# Altium PCB G031_Dev.PcbDoc
Units mil, origin at the board's own origin, x right, y up, seen from the top; angles counter-clockwise.
Board outline 2525 x 800 mil, 2 copper layers (Top Layer, Bottom Layer), stack 38.548 mil thick; 45 components, 55 nets, 211 pads, 106 vias.
Unrouted connection lines stored in the file: 3.
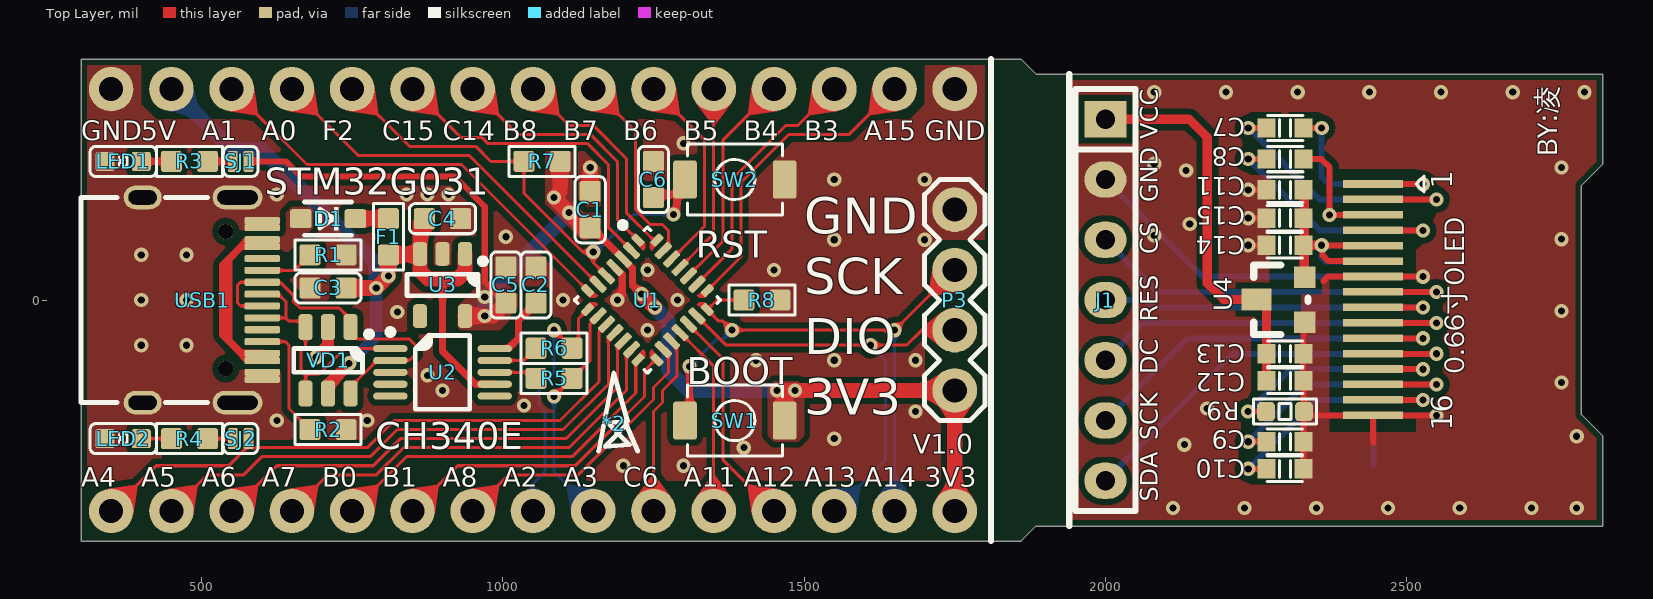
[diagram p0: Top Layer view]
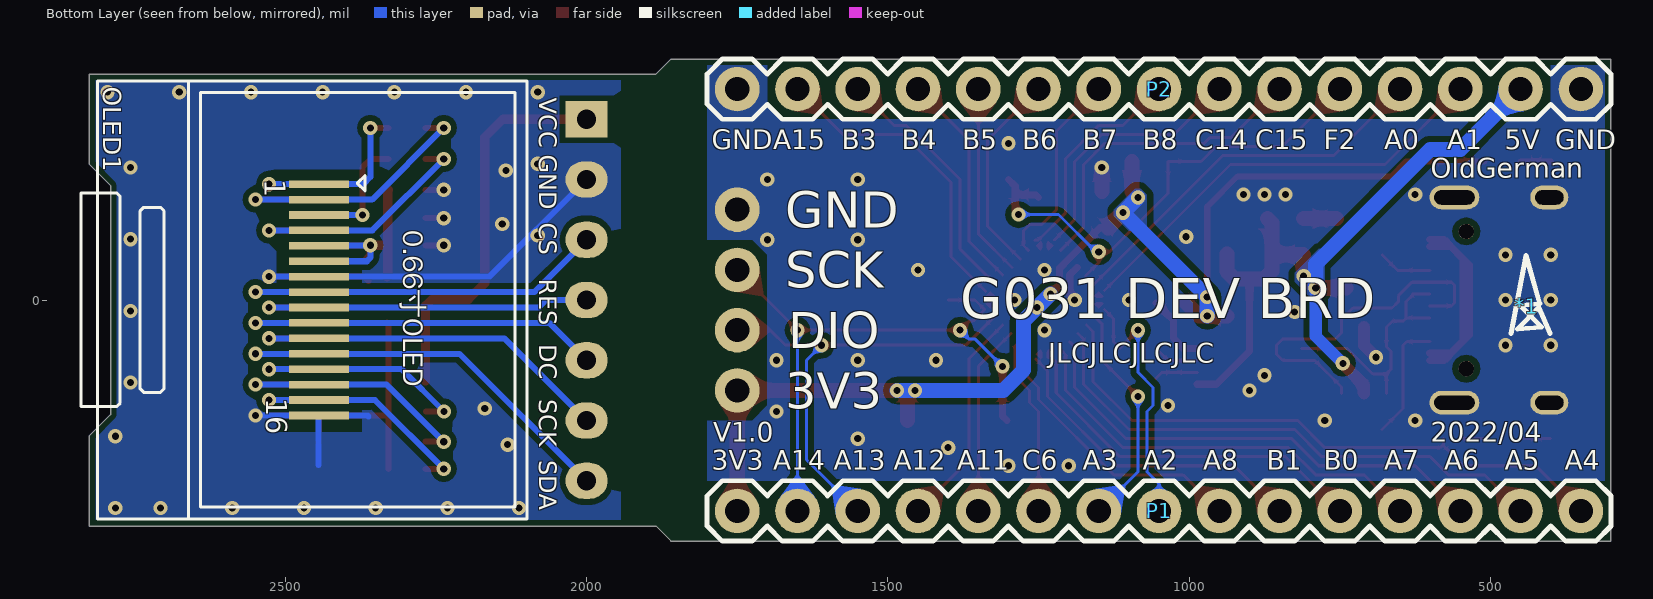
[diagram p1: Bottom Layer view, seen from below]

## Layer stack, top to bottom
Top Solder: solder mask 0.4, Solder Resist, Dk 3.5
Top Layer: signal copper 1.4
Dielectric 1: dielectric 35.748, FR-4, Dk 4.8
Bottom Layer: signal copper 1.4
Bottom Solder: solder mask 0.4, Solder Resist, Dk 3.5

## Board outline
300,-400 300,400 1860,400 1885,375 2825,375 2825,225 2790,190 2790,-190 2825,-225 2825,-375 1885,-375 1860,-400

## Design rules (kind name [scope] priority, off if disabled: settings)
BoardOutlineClearance [All] p1: gap=0 ignorepadtopadclearanceinfootprint=FALSE except(10: Poly-OutlineEdge Poly-CavityEdge Poly-CutoutEdge Poly-SplitBarrior)
Clearance [All] p1: gap=5 ignorepadtopadclearanceinfootprint=FALSE except(0: Arc-Hole Track-Hole SMDPad-Hole THPad-Hole Via-Hole Fill-Hole Poly-Hole Region-Hole Text-Hole; 10: Arc-Fill Arc-Poly Arc-Region Track-Fill Track-Poly Track-Region SMDPad-Fill SMDPad-Poly SMDPad-Region THPad-Fill THPad-Poly THPad-Region Via-Fill Via-Poly Via-Region Fill-Fill Fill-Poly Fill-Region Poly-Poly Poly-Region Region-Region)
HoleSize [All] p1: absolutevalues=TRUE maxlimit=196.85 minlimit=11.81 maxpercent=80.000 minpercent=20.000
MinimumSolderMaskSliver [All] p1: minsoldermaskwidth=0
PlaneClearance [All] p1: clearance=10
PlaneConnect [All] p1: planeconnectstyle=Direct reliefexpansion=20 reliefentries=4 reliefconductorwidth=10 reliefairgap=10
PolygonConnect [All] p1: connectstyle=Direct reliefconductorwidth=10 reliefentries=4 polygonreliefangle="90 Angle" airgapwidth=10
RoutingVias [All] p1: holewidth=11.81 width=23.62 viastyle="Through Hole" minholewidth=11.81 minwidth=23.62 maxholewidth=196.85 maxwidth=208.66
SilkToSilkClearance [All] p1: silktosilkclearance=0
SilkToSolderMaskClearance [IsPad] p1: minsilkscreentomaskgap=0 clearancetoexposedcopper=TRUE
SolderMaskExpansion [All] p1: expansion=2
Width [All] p1: maxlimit=50 minlimit=5 preferedwidth=5
24 further rules are at their usual default settings.

## Components (designator, comment, footprint, x,y, rotation, side; value= is the part's Value field where it differs from the comment)
*1 "ODG_LOGO" ODG_LOGO 440,-10 r180 bottom
*2 "ODG_LOGO" ODG_LOGO 1185,-205 r0 top
C1 "1uF/X7R" C0603 1145,150 r90 top value=0.1u
C2 "100nF" C0603 1055,25 r270 top value=0.1u
C3 "100nF" C0603 710,20 r0 top value=0.1u
C4 "1uF/X7R" C0603 900,135 r180 top value=0.1u
C5 "1uF/X7R" C0603 1005,25 r270 top value=0.1u
C6 "100nF" C0603 1250,200 r270 top value=0.1u
C7 "1uF" 0603-C 2297.98,285.59 r0 top
C8 "1uF" 0603-C 2297.98,233.9 r0 top
C9 "4.7uF" 0603-C 2297.98,-235.1 r180 top
C10 "2.2uF" 0603-C 2297.98,-280.1 r180 top
C11 "4.7uF" 0603-C 2297.98,182.9 r0 top
C12 "106" 0603-C 2297.98,-134.1 r0 top
C13 "104" 0603-C 2297.98,-89.1 r0 top
C14 "104" 0603-C 2297.98,90.9 r180 top
C15 "106" 0603-C 2297.98,135.9 r180 top
D1 "B5819W" SOD-323 710,135 r0 top
F1 "6V/0.5A" FUSE0603_0.5MM 810,105 r270 top
J1 "2.54*1*7" "Pin HDR1X7/2.54mm-S" 2000,300 r0 top
LED1 "LED" LED0603_GREEN 370,230 r180 top value=color?
LED2 "LED" LED0603_YELLOW 370,-230 r180 top value=color?
OLED1 "0.66寸OLED" 0.66OLED-W 2444,0.39 r270 bottom
P1 "CONN_X15" 2.54MM_MALE_X15 350,-350 r0 bottom locked
P2 "CONN_X15" 2.54MM_MALE_X15 350,350 r0 bottom locked
P3 "CONN_X4" 2.54mm_Male_x4 1750,-150 r90 top locked
R1 "5.1K" R0603 710,75 r180 top value=22R
R2 "5.1K" R0603 710,-215 r0 top value=22R
R3 "5.1K" R0603 480,230 r180 top value=22R
R4 "5.1K" R0603 480,-230 r180 top value=22R
R5 "470R" R0603 1085,-130 r0 top value=22R
R6 "470R" R0603 1085,-80 r0 top value=22R
R7 "10K" R0603 1065,230 r180 top value=22R
R8 "10K" R0603 1430,0 r0 top value=22R
R9 "390K" 0603-R 2298,-185 r0 top
SJ1 "SJ_2P" SJ_2P_MINI 565,230 r180 top
SJ2 "SJ_2P" SJ_2P_MINI 565,-230 r180 top
SW1 "Button-2P" SWITCH_3X4_SMD 1385,-200 r0 top
SW2 "Button-2P" SWITCH_3X4_SMD 1385,200 r180 top
U1 "STM32G031G8U6" UFQFPN28-4x4mm_ODG 1240,0 r315 top locked
U2 "CH340E" "TI MSOP-10 DGS" 900,-120 r0 top
U3 "ME6211C33M5G" "ANALOG TSOT-23-5 UJ-5" 900,25 r270 top
U4 "SC662K-3.3V" SOT-23 2296,-2 r90 top
USB1 "Type-C" Type-C-TOP 300,0 r180 top locked
VD1 "USBLC6-2" "MICROCHIP SOT-23-6 M6" 710,-100 r270 top

## Footprints (in the part's own frame and the unit in brackets; to place one, negate y for a bottom-side part, rotate by r counter-clockwise, add the part's x,y. Pads: shape width x height; smd on the part's side, far side on the other; paste and mask are expansions set on the pad)
0.66OLED-W [mm]
  rect 0.32x2.54 smd: 1(-4.875,0) 2(-4.225,0) 3(-3.575,0) 4(-2.925,0) 5(-2.275,0) 6(-1.625,0) 7(-0.975,0) 8(-0.325,0) 9(0.325,0) 10(0.975,0) 11(1.625,0) 12(2.275,0) 13(2.925,0) 14(3.575,0) 15(4.225,0) 16(4.875,0)
  silkscreen extent -9.23,-10.03 9.23,8.76, body extent -9.23,-10.03 9.23,8.76, height 1.41
2.54mm_Male_x4 [mil]
  round 74 hole 40: 1(0,0) 2(100,0) 3(200,0) 4(300,0)
  silkscreen extent -50,-50 350,50
2.54MM_MALE_X15 [mil]
  round 74 hole 40: 1(0,0) 2(100,0) 3(200,0) 4(300,0) 5(400,0) 6(500,0) 7(600,0) 8(700,0) 9(800,0) 10(900,0) 11(1000,0) 12(1100,0) 13(1200,0) 14(1300,0) 15(1400,0)
  silkscreen extent -50,-50 1450,50
0603-C [mil] "Murata & TDK 0603,25V,±10%,X7R,SERAMIC"
  rect 30x32 smd mask+2: 1(-31,0) 2(31,0)
  silkscreen extent -29,-21 30,21, body extent -46,-16 46,16, height 31
0603-R [mil]
  rrect50% 30x32 smd mask+2: 1(-31.5,0) 2(31.5,0)
  silkscreen extent -52,-21 52,21, body extent -31,-16 32,16, height 18
"ANALOG TSOT-23-5 UJ-5" [mm] "SOT23, 5-Leads, Body 2.90x1.60mm, Pitch 0.95mm, IPC Medium Density"
  rrect50% 1x0.6 smd: 1(-1.31,0.95) 2(-1.31,0) 3(-1.31,-0.95) 4(1.31,-0.95) 5(1.31,0.95)
  silkscreen extent -1.12,-1.5 0.45,1.83, body extent -1.4,-1.45 1.4,1.45, height 1
C0603 [mil]
  rrect20% 35x35 smd: 1(-30,0) 2(30,0)
  silkscreen extent -55,-25 55,25, body extent -31,-16 32,16, height 32
FUSE0603_0.5MM [mil]
  rrect25% 35x35 smd: 1(-30,0) 2(30,0)
  silkscreen extent -55,-25 55,25, body extent -30,-17 30,17, height 23
LED0603_GREEN [mm] "Chip Diode, 2-Leads, Body 1.60x0.80mm, IPC Medium Density"
  rrect20% 0.8x0.8 smd: 1(-0.762,0) 2(0.762,0)
  silkscreen extent -1.4,-0.64 1.4,0.64, body extent -0.8,-0.4 0.8,0.4, height 0.53
LED0603_YELLOW [mm] "Chip Diode, 2-Leads, Body 1.60x0.80mm, IPC Medium Density"
  rrect20% 0.8x0.8 smd: 1(-0.762,0) 2(0.762,0)
  silkscreen extent -1.4,-0.64 1.4,0.64, body extent -0.8,-0.4 0.8,0.4, height 0.53
"MICROCHIP SOT-23-6 M6" [mm] "SOT23, 6-Leads, Body 2.90x2.80mm, Pitch 0.95mm, IPC Medium Density"
  rrect50% 1.1x0.6 smd: 1(-1.4,0.95) 2(-1.4,0) 3(-1.4,-0.95) 4(1.4,-0.95) 5(1.4,0) 6(1.4,0.95)
  silkscreen extent -1.22,-1.45 0.5,1.85, body extent -1.46,-1.45 1.46,1.45, height 1.45
ODG_LOGO [mil]
  silkscreen extent -26,-46 39,84
"Pin HDR1X7/2.54mm-S" [mil]
  rect 70x60 hole 32: 1(0,0)
  oval 70x60 hole 32: 2(0,-100) 3(0,-200) 4(0,-300) 5(0,-400) 6(0,-500) 7(0,-600)
  silkscreen extent -50,-650 50,50, body extent -50,-650 50,50, height 336
R0603 [mil]
  rrect25% 35x35 smd: 1(-30,0) 2(30,0)
  silkscreen extent -55,-25 55,25, body extent -31,-16 31,16, height 18
SJ_2P_MINI [mil]
  rrect30% 16x35 smd: 1(-13,0) 2(13,0)
  silkscreen extent -29,-25 29,25
SOD-323 [mm]
  rrect25% 0.9x0.8 smd: 1(-1.15,0) 2(1.15,0)
  silkscreen extent -1,-0.7 1,0.7, body extent -1.36,-0.62 1.36,0.63, height 1.05
SOT-23 [mil]
  rect 36x36 smd: 1(-35,-35) 2(40,-35)
  rect 36x50 smd: 3(3,45)
  silkscreen extent -55,-40 60,50, body extent -54,-48 60,62, height 47
SWITCH_3X4_SMD [mm]
  rrect20% 1x1.6 smd: 1(-2.1,0) 2(2.1,0)
  silkscreen extent -2,-1.5 2,1.5, body extent -2.5,-1.46 2.5,1.44, height 2.5
"TI MSOP-10 DGS" [mm] "MSOP, 10-Leads, Body 3.00x3.00mm, Pitch 0.50mm, IPC Medium Density"
  oval 1.45x0.3 smd: 1(-2.2,1) 2(-2.2,0.5) 3(-2.2,0) 4(-2.2,-0.5) 5(-2.2,-1) 6(2.2,-1) 7(2.2,-0.5) 8(2.2,0) 9(2.2,0.5) 10(2.2,1)
  silkscreen extent -2.32,-1.55 1.15,1.82, body extent -2.45,-1.55 2.45,1.55, height 1.1
Type-C-TOP [mm]
  round 0.65 hole 0.65: 0(-6.1,-2.89) 0(-6.1,2.89)
  oval 1.6x1 hole 0.6 slot 1.2 at 0 deg: 1(-2.6,4.325) 2(-2.6,-4.325)
  oval 2.1x1 hole 0.6 slot 1.7 at 0 deg: 3(-6.6,-4.325) 4(-6.6,4.325)
  rrect50% 1.5x0.3 smd: A1(-7.64,-3.35) A4(-7.64,-2.55) A5(-7.64,-1.25) A6(-7.64,-0.25) A7(-7.64,0.25) A8(-7.64,1.25) A9(-7.64,2.55) A12(-7.64,3.35) B1(-7.64,3.05) B4(-7.64,2.25) B5(-7.64,1.75) B6(-7.64,0.75) B7(-7.64,-0.75) B8(-7.64,-1.75) B9(-7.64,-2.25) B12(-7.64,-3.05)
  silkscreen extent -5.34,-4.33 0,4.33, body extent -7.69,-4.48 0.06,4.48, height 3.26
UFQFPN28-4x4mm_ODG [mil]
  rrect50% 22x12 smd: 1(-81.5,59.06) 7(-81.5,-59.06) 15(81.5,-59.06) 21(81.5,59.06)
  rrect50% 32x12 smd: 2(-76.5,39.37) 3(-76.5,19.69) 4(-76.5,0) 5(-76.5,-19.69) 6(-76.5,-39.37) 16(76.5,-39.37) 17(76.5,-19.69) 18(76.5,0) 19(76.5,19.69) 20(76.5,39.37)
  rrect50% 12x22 smd: 8(-59.06,-81.5) 14(59.06,-81.5) 22(59.06,81.5) 28(-59.06,81.5)
  rrect50% 12x32 smd: 9(-39.37,-76.5) 10(-19.69,-76.5) 11(0,-76.5) 12(19.69,-76.5) 13(39.37,-76.5) 23(39.37,76.5) 24(19.69,76.5) 25(0,76.5) 26(-19.69,76.5) 27(-39.37,76.5)
  Top Layer region: -58,63 -65,70 -65,74 -53,74 -53,63
  Top Layer region: -63,-58 -70,-65 -74,-65 -74,-53 -63,-53
  Top Layer region: 58,-63 65,-70 65,-74 53,-74 53,-63
  Top Layer region: 63,58 70,65 74,65 74,53 63,53
  Top Layer region: -63,58 -70,65 -74,65 -74,53 -63,53
  Top Layer region: -58,-63 -65,-70 -65,-74 -53,-74 -53,-63
  Top Layer region: 63,-58 70,-65 74,-65 74,-53 63,-53
  Top Layer region: 58,63 65,70 65,74 53,74 53,63
  silkscreen extent -122,-86 86,86, body extent -81,-81 81,81, height 24

## Part data
C1 C2 C3 C4 C5 C6: library part CAP, "Capacitor"
C7 C8 C9 C10 C11 C12 C13 C14 C15: library part CAP, "无极性电容"
D1: library part DIODE, "二极管"
F1: library part FUSE, "贴片自恢复保险丝"
J1: library part "Pin HDR1X7"
R1 R2 R3 R4 R5 R6 R7 R8: library part RES, "Resistor"
R9: library part RES
SJ1 SJ2: "焊接跳线"
SW1 SW2: "Button"
U1: "No Description Available", Mfr_Name=STMicroelectronics, Copyright="Copyright (C) 2022 Ultra Librarian. All rights reserved.", Manufacturer_Part_Number=STM32G031G8U6, RefDes=RefDes, Type=DEV
U3: "线性稳压芯片", BOM名称=¿Éµ÷É, 学习资源=www.ooocke.
U4: library part AMS1117, "三端稳压芯片"
USB1: library part USB-Type-C_16P
VD1: "Very low capacitance ESD protection / Features / ? 2 data-line protection / ? Protects VBUS / ? Very low capacitance: 3.5 pF max. / ? Very low leakage current: 150 nA max. / ? SOT-666 and SOT23-6L packages / ? RoHS compliant", BOM名称=Ç¯Î, 学习资源=www.ooocke., 属性=30V/0.2

## Free pads (board coordinates)
  rect 100x12.6 smd: 1(2444.23,192.61) 2(2444.23,167.02) 3(2444.23,141.43) 4(2444.23,115.84) 5(2444.23,90.25) 6(2444.23,64.66) 7(2444.23,39.07) 8(2444.23,13.48) 9(2444.23,-12.11) 10(2444.23,-37.71) 11(2444.23,-63.3) 12(2444.23,-88.89) 13(2444.23,-114.48) 14(2444.23,-140.07) 15(2444.23,-165.66) 16(2444.23,-191.25)

## Via types
v1: diameter 23.62, hole 11.81, Top Layer to Bottom Layer, tented both sides, 106 vias

## Nets (pads, with @x,y where several pads share a name; then routed paths per layer and width w, separated by ;. In a path a pad name is that pad's centre, name@x,y a point inside that pad or via, vN(x,y) a via of type N, cw(c..) or ccw(c..) an arc to the next point about the centre after c; other vN are vias at no path point)
3V3: C11.2 C14.1 C15.1 OLED1.5 OLED1.6 U4.2 | length 559.7
  Top Layer w10: C14.1 C14.1@2329.99,90.9 ; v1(2358.86,90.9) 2360.39,89.37 2360.39,74.22 2369.96,64.66 2444.23,64.66 ; v1@2359.19,90.58 2443.9,90.58 2444.23,90.25
  Top Layer w15: C11.2 2329.99,181.89 C14.1@2329.99,90.9 ; U4.2 2329.99,39.01 C14.1@2329.99,90.9 ; v1(2358.86,90.9) C14.1@2329.99,90.9
  Bottom Layer w10: OLED1.6 2364.72,64.36 2358.86,70.22 v1(2358.86,90.9) 2359.34,90.43 2443.52,90.43 OLED1.5
+3V3: C1.1 C5.2 P1.15 P3.1 R7.1 SJ1.1 SW1.2 U1.3 U3.5 | length 2176.5
  Top Layer w10: SJ1.1 640,230 665,205 920,205 970,155 970,30 C5.2
  Top Layer w12: C1.1@1135,120 C1.1 1147.84,120 U1.3 1215,52.84 1215,25 v1(1230,10)
  Top Layer w25: U3.5 v1(970,-26.57) 983.43,-26.57 C5.2 ; R7.1 1095,180 v1(1085,170) C1.1@1135,120 ; v1(1230,10) v1(1252.5,-12.5) ; v1(1455,-150) 1467.68,-150 ; SW1.2 1467.68,-150 ; P1.15 P3.1 v1(1485,-150) 1467.68,-150
  Bottom Layer w25: v1(970,-26.57) v1(970,5) v1(1110,145) v1(1085,170) ; v1(1230,10) v1(1252.5,-12.5) 1275,-35 1275,-116.45 1308.55,-150 v1(1455,-150) v1(1485,-150)
+5: D1.1 USB1.A4 USB1.A9 USB1.B4 USB1.B9 | length 546.3
  Top Layer w12: USB1.B4@600.69,-88.49 566.32,-88.49 545,-67.17 545,67.35 566.32,88.68 USB1.B9@600.69,88.68 ; USB1.A9 577.35,-100.39 535,-58.04 535,58.04 577.35,100.39 USB1.A4
CH340E_RX: R6.1 U2.9 | length 76.8
  Top Layer w5: U2.9 1034.69,-100.31 R6.1
CH340E_TX: R5.1 U2.8 | length 72.5
  Top Layer w5: U2.8 1045,-120 R5.1
CS#: J1.3 OLED1.8 | length 690.5
  Top Layer w10: 2444.23,13.48 2444.52,13.18 v1(2549.32,13.18)
  Bottom Layer w10: J1.3 2086.82,13.18 OLED1.8 v1(2549.32,13.18)
D+: U2.1 USB1.A6 USB1.B6 VD1.3 VD1.4 | length 424.5
  Top Layer w5: USB1.B6 640,-29.53 ; USB1.A6 627.72,9.84 640,-2.44 640,-29.53 ; VD1.4 672.6,-122.6 ; U2.1 737.24,-80.63 695.28,-122.6 672.6,-122.6 ; 640,-29.53 640,-30 645,-35 662.72,-35 VD1.3 672.6,-77.4 665,-85 665,-115 672.6,-122.6
D-: U2.2 USB1.A7 USB1.B7 VD1.1 VD1.6 | length 587.6
  Top Layer w5: USB1.A7 564.84,-9.84 560,-5 560,25 564.53,29.53 USB1.B7 630.47,29.53 653,7 653,-3 663.39,-13.39 728.39,-13.39 747.4,-32.4 VD1.1 747.4,-54.51 757.9,-65 845,-65 855,-75 855,-90 844.69,-100.31 U2.2 791.47,-100.31 747.4,-144.39 VD1.6
D/C#: J1.5 OLED1.10 | length 680.2
  Top Layer w10: 2444.23,-37.71 2444.52,-38 v1(2549.32,-38)
  Bottom Layer w10: J1.5 2062,-38 OLED1.10 v1(2549.32,-38)
GND: C1.2 C2.1 C3.1 C4.1 C5.1 C6.1 C9.1 C10.1 C11.1 C12.2 C13.2 C14.2 C15.2 J1.2 LED1.2 LED2.2 OLED1.7 OLED1.16 P2.1 P2.15 P3.4 R1.1 R2.2 R8.2 R9.2 SW2.1 U1.4 U2.3 U3.2 U4.1 USB1.1 USB1.2 USB1.3 USB1.4 USB1.A1 USB1.A12 USB1.B1 USB1.B12 VD1.2 | length 1747
  Top Layer w10: v1(2237.1,90.9) C14.2 ; v1(2237.1,135.9) C15.2 ; v1(2237.1,182.9) C11.1 ; C10.1 C9.1 C12.2 C13.2 2328.98,-39.02 U4.1 ; R9.2 2335.74,-191.25 2483.22,-191.25 2483.51,-191.54 v1(2549.32,-191.54) ; 2362,32 2369.07,39.07 2444.23,39.07 2444.37,38.92 2526.93,38.92 v1(2527.08,38.77)
  Top Layer w12: U1.4 1198,42 1198,8 v1(1190,0)
  Top Layer w20: v1(690,-95) 710,-75 VD1.2
  Top Layer w25: C1.2 v1(1145,220)
  Bottom Layer w10: J1.2 2161.23,38.77 OLED1.7 v1(2527.08,38.77) ; 2362.2,-192.91 2363.57,-191.54 OLED1.16 v1(2549.32,-191.54) ; 2444.88,-273.34 OLED1.16@2444.88,-192.91
  other v1: 2112,-345 2231,-345 2350,-345 2469,-345 2588,-345 2707,-345 2782,-345 1200,-275 1300,-275 1400,-245 2131,-240 1550,-230 2782,-226 625,-200 775,-200 1685,-185 2169,-180 1035,-175 900,-150 2757,-137 875,-125 1420,-100 1550,-100 1685,-100 400,-75 475,-75 1240,-50 825,-20 2757,-18 400,0 475,0 1100,0 1290,0 1240,50 1450,50 400,75 475,75 1550,100 1700,100 2757,101 1005,105 2081,107 2140,126 625,175 840,175 875,175 910,175 1550,200 1700,200 2134,215 2757,220 2081,226 1300,260 2081,345 2200,345 2319,345 2438,345 2557,345 2676,345 2795,345
NetC2_2: C2.2 U2.10 | length 117.1
  Top Layer w12: U2.10 1009.06,-80.63 1026.13,-63.56 1026.13,-33.87 C2.2
NetC7_1: C7.1 OLED1.2 | length 496.6
  Top Layer w10: v1(2237.1,285.59) C7.1 ; 2444.23,167.02 2444.51,166.73 v1(2549.33,166.73)
  Bottom Layer w10: v1(2237.1,285.59) 2355.96,166.72 OLED1.2 v1(2549.33,166.73)
NetC7_2: C7.2 OLED1.1 | length 367.4
  Top Layer w10: C7.2 v1(2358.86,285.59) ; 2444.23,192.61 2444.37,192.46 2526.93,192.46 v1(2527.08,192.32)
  Bottom Layer w10: v1(2358.86,285.59) 2358.86,204.14 2370.68,192.32 OLED1.1 v1(2527.08,192.32)
NetC8_1: C8.1 OLED1.4 | length 451.9
  Top Layer w10: v1(2237.1,233.9) C8.1 ; 2444.23,115.84 2444.37,115.69 2526.93,115.69 v1(2527.08,115.54)
  Bottom Layer w10: v1(2237.1,233.9) 2355.46,115.54 OLED1.4 v1(2527.08,115.54)
NetC8_2: C8.2 OLED1.3 | length 272.3
  Top Layer w10: C8.2 2358.25,233.9 2372,220.15 v1(2372,141) 2372.21,141.21 2444.01,141.21 2444.23,141.43
  Bottom Layer w10: v1(2372,141) 2372.07,141.07 2443.93,141.07 OLED1.3
NetC9_2: C9.2 OLED1.14 | length 486.6
  Top Layer w10: v1(2237.1,-235.1) C9.2 ; 2444.23,-140.07 2444.52,-140.36 v1(2549.32,-140.36)
  Bottom Layer w10: v1(2237.1,-235.1) 2331.83,-140.36 OLED1.14 v1(2549.32,-140.36)
NetC10_2: C10.2 OLED1.15 | length 450.1
  Top Layer w10: v1(2237.1,-280.1) C10.2 ; 2444.23,-165.66 2444.37,-165.81 2526.93,-165.81 v1(2527.08,-165.95)
  Bottom Layer w10: v1(2237.1,-280.1) 2351.24,-165.95 OLED1.15 v1(2527.08,-165.95)
NetD1_2: D1.2 F1.1 | length 54.7
  Top Layer w25: D1.2 F1.1
NetLED1_1: LED1.1 R3.2 | length 50
  Top Layer w10: LED1.1 R3.2
NetLED2_1: LED2.1 R4.2 | length 50
  Top Layer w5: LED2.1 R4.2
NetOLED1_13: OLED1.13 R9.1 | length 432.4
  Top Layer w10: v1(2236.62,-185) R9.1 ; 2444.23,-114.48 2444.37,-114.62 2526.93,-114.62 v1(2527.08,-114.77)
  Bottom Layer w10: v1(2236.62,-185) 2306.85,-114.77 OLED1.13 v1(2527.08,-114.77)
NetR1_2: R1.2 USB1.A5 | length 89.9
  Top Layer w5: USB1.A5 654.21,49.21 R1.2
NetR2_1: R2.1 USB1.B5 | length 201.2
  Top Layer w5: USB1.B5 638.9,-68.9 645,-75 645,-180 R2.1
NetR3_1: R3.1 SJ1.2 | length 42
  Top Layer w10: R3.1 SJ1.2
NetR4_1: R4.1 SJ2.2 | length 42
  Top Layer w5: R4.1 SJ2.2
PA0: P2.4 U1.6 | length 642.2
  Top Layer w5: P2.4 760,240 944.32,240 U1.6
PA1: P2.3 U1.7 | length 729
  Top Layer w5: P2.3 675,225 931.48,225 U1.7
PA2/TX: P1.8 R6.2 U1.8 | length 439.9
  Top Layer w5: v1(1085,-50) R6.2 1125.62,-69.38 1125.62,-30.86 U1.8
  Bottom Layer w5: P1.8 1050,-305 1070,-285 1070,-185 1060,-175 1060,-145 1085,-120 v1(1085,-50)
PA3/RX: P1.9 R5.2 U1.9 | length 378.9
  Top Layer w5: v1(1085,-160) R5.2 1145,-100 1145,-39.32 U1.9@1156.65,-27.67
  Bottom Layer w5: v1(1085,-160) 1085,-285 P1.9
PA4: P1.1 SJ2.1 U1.10 | length 1012.4
  Top Layer w5: P1.1 425,-275 545,-275 578,-242 SJ2.1@578,-239.5 ; SJ2.1 SJ2.1@578,-239.5 ; U1.10@1170.57,-41.59 1160,-52.16 1160,-135 1095,-200 820,-200 775,-245 583.5,-245 SJ2.1@578,-239.5
PA5: P1.2 U1.11 | length 900.4
  Top Layer w5: P1.2 510,-290 570,-290 600,-260 780,-260 825,-215 1100,-215 1175,-140 1175,-65 U1.11@1184.49,-55.51
PA6: P1.3 U1.12 | length 804
  Top Layer w5: P1.3 625,-275 785,-275 830,-230 1105,-230 1190,-145 1190,-77.84 U1.12@1198.41,-69.43
PA7: P1.4 U1.13 | length 707.5
  Top Layer w5: P1.4 710,-290 790,-290 835,-245 1110,-245 1205.2,-149.8 1205.2,-90.47 U1.13@1212.33,-83.35
PA8: P1.7 U1.16 | length 471.5
  Top Layer w5: P1.7 1010,-290 1125,-290 1250,-165 1250,-145 1274.8,-120.2 1274.8,-90.47 U1.16@1267.67,-83.35
PA11: P1.11 U1.18 | length 317.1
  Top Layer w5: U1.18@1295.51,-55.51 1350,-110 P1.11
PA12: P1.12 U1.19 | length 366.6
  Top Layer w5: U1.19@1309.43,-41.59 1365,-97.16 1365,-265 P1.12
PA13/SWDIO: P1.13 P3.2 U1.20 | length 777.2
  Top Layer w5: U1.20@1323.35,-27.67 1370.68,-75 v1(1610,-75) 1670,-75 1695,-50 P3.2
  Bottom Layer w5: P1.13 1635,-265 1635,-100 v1(1610,-75)
PA14/SWCLK/B\O\O\T\0\: P1.14 P3.3 R8.1 SW1.1 U1.21 | length 1021.5
  Top Layer w5: R8.1 1355.26,0 U1.21 1358.52,-35 1365.14,-35 v1(1380.14,-50) v1(1650,-50) P3.3
  Top Layer w12: SW1.1 1310,-192.32 v1(1310,-110)
  Bottom Layer w5: v1(1310,-110) 1355.06,-64.94 1365.2,-64.94 v1(1380.14,-50) ; P1.14 v1(1650,-50)
PA15: P2.14 U1.22 | length 523.4
  Top Layer w5: U1.22@1337.97,14.46 U1.22 1395,71.48 1395,195 1475,275 1575,275 P2.14
PB0: P1.5 U1.14 | length 608.1
  Top Layer w5: P1.5 840,-260 1115,-260 1220.59,-154.41 1220.59,-102.92 U1.14
PB1: P1.6 U1.15 | length 533.8
  Top Layer w5: P1.6 925,-275 1120,-275 1235,-160 1235,-117.43 U1.15@1254.46,-97.97
PB3: P2.13 U1.23 | length 427.9
  Top Layer w5: U1.23@1323.35,27.67 1380,84.32 1380,200 1470,290 1490,290 P2.13
PB4: P2.12 U1.24 | length 366.6
  Top Layer w5: U1.24@1309.43,41.59 1365,97.16 1365,265 P2.12
PB5: P2.11 U1.25 | length 319.1
  Top Layer w5: U1.25 1350,110 P2.11
PB6: P2.10 U1.26 | length 339.9
  Top Layer w5: P2.10 1335,265 1335,122.84 U1.26
PB7: P2.9 U1.27 | length 335.2
  Top Layer w5: P2.9 1220,280 1220,150 1245,125 1265,125 1275,115 1275,90.68 U1.27
PB8: P2.8 U1.28 | length 363.2
  Top Layer w5: P2.8 1110,290 1150,290 1205,235 1205,145 1250.23,99.77 1256.25,99.77 U1.28
PC6: P1.10 U1.17 | length 299.6
  Top Layer w5: P1.10 1250,-185 1265,-170 1265,-150 1288.72,-126.28 1288.72,-76.55 U1.17@1281.59,-69.43
PC14: P2.7 U1.1 | length 434.5
  Top Layer w5: P2.7 1025,275 1145,275 1190,230 1190,133.52 U1.1
PC15: P2.6 U1.2 | length 535.9
  Top Layer w5: P2.6 930,270 965,270 975,260 1140,260 1175,225 1175,120.68 U1.2
PF2/N\R\S\T\: C6.2 P2.5 R7.2 SW2.2 U1.5 | length 856.4
  Top Layer w5: P2.5 845,255 955,255 980,230 R7.2 1035,177.16 1132.16,80 v1(1150,80) 1150,62.16 U1.5
  Top Layer w12: C6.2 1254.5,174.5 1288.64,174.5 SW2.2@1288.8,174.66 ; v1(1283.22,141.78) 1283.22,144.93 1288.8,150.5 SW2.2@1288.8,174.66 ; SW2.2@1300,200 1288.8,188.8 SW2.2@1288.8,174.66
  Bottom Layer w5: v1(1150,80) 1155,80 1216.78,141.78 v1(1283.22,141.78)
RES#: J1.4 OLED1.9 | length 615.2
  Top Layer w10: 2444.23,-12.11 2444.37,-12.26 2526.93,-12.26 v1(2527.08,-12.41)
  Bottom Layer w10: J1.4 2066.8,0 2079,-12.2 2443.8,-12.2 OLED1.9 v1(2527.08,-12.41)
SCLK: J1.6 OLED1.11 | length 666.6
  Top Layer w10: 2444.23,-63.3 2444.37,-63.44 2526.93,-63.44 v1(2527.08,-63.59)
  Bottom Layer w10: J1.6 2136.41,-63.59 OLED1.11 v1(2527.08,-63.59)
SDIN: J1.7 OLED1.12 | length 741.9
  Top Layer w10: 2444.23,-88.89 2444.52,-89.18 v1(2549.32,-89.18)
  Bottom Layer w10: J1.7 2210.82,-89.18 OLED1.12 v1(2549.32,-89.18)
VCC: C3.2 C4.2 C12.1 C13.1 F1.2 J1.1 P2.2 U2.7 U3.1 U3.3 U4.3 VD1.5 | length 1970
  Top Layer w12: 900,35 900,-85 954.59,-139.59 986.52,-139.59 U2.7
  Top Layer w15: J1.1 2139,300 2169,270 2169,28 2196,1 U4.3 2256.48,1 2266.98,-9.5 C13.1 C12.1
  Top Layer w20: VD1.5 710,-140.98 745,-105.98 v1(745,-105)
  Top Layer w25: C3.2 v1(790,20) v1(810,40) F1.2 810.79,75.79 861.81,75.79 U3.3 ; C4.2 862.6,127.6 U3.3 ; U3.1 937.4,47.4 925,35 900,35 876.13,35 862.6,48.53 U3.3
  Bottom Layer w20: v1(745,-105) 790,-60 v1(790,20)
  Bottom Layer w25: P2.2 550,250 600,250 790,60 v1(790,20)
pads on no net: U2.4 U2.5 U2.6 U3.4 USB1.0 USB1.A8 USB1.B8
copper on no net: | length 45.2
  Top Layer w10: 2444.23,-191.25 2444.23,-212.55 2444.23,-235.57 2444.88,-236.22

## Polygon pours and split planes (outlines as drawn)
GND on Top Layer "NONET_L-01_P-001" (solid, remove dead copper, pour order 36): 2823,-373 1943,-373 1943,374 2823,374 2823,197.35 2790.5,197.35 2790.5,-196.35 2823,-196.35
GND on Top Layer "Bottom Layer-GND" (solid, remove dead copper, pour order 28): 300,300 300,400 400,400 400,325 425,300 1675,300 1700,325 1700,400 1800,400 1800,100 1725,100 1700,75 1700,-175 1725,-200 1800,-200 1800,-300 300,-300
+3V3 on Top Layer "Top Layer-+3V3 2" (solid, pour order 14): 1450,-235 1440,-225 1440,-145 1450,-135 1490,-135 1500,-145 1500,-225 1490,-235
+3V3 on Top Layer "Top Layer-+3V3 3" (solid, pour order 2): 1070,160 1130,100 1165,100 1165,140 1160,145 1135,145 1115,165 1115,245 1110,250 1075,250 1070,245
+3V3 on Top Layer "Top Layer-+3V3" (solid, pour order 6): 925,-10 965,30 1005,30 1025,10 1025,-20 995,-50 930,-50 925,-45
+5 on Top Layer "Top Layer-+5 1" (solid, pour order 12): 635,110 575,110 570,105 570,85 575,80 645,80 685,120 685,150 680,155 650,155 640,145 640,115
GND on Bottom Layer "NONET_L-01_P-001" (solid, remove dead copper, pour order 38): 2823,-373 1943,-373 1943,374 2823,374 2823,197.35 2790.5,197.35 2790.5,-196.35 2823,-196.35
GND on Bottom Layer "Bottom Layer-GND" (solid, remove dead copper, pour order 30): 300,300 300,400 400,400 400,325 425,300 1675,300 1700,325 1700,400 1800,400 1800,100 1725,100 1700,75 1700,-175 1725,-200 1800,-200 1800,-300 300,-300
VCC on Bottom Layer "vcc-2" (solid, pour order 24): 812.6,61.72
VCC on Bottom Layer "vcc-2" (solid, pour order 22): 785,70
VCC on Bottom Layer "Bottom Layer-VCC" (solid, pour order 7): 775,10 790,-5 825,30 825,45 785,85 775,85
+3V3 on Bottom Layer "00" (solid, pour order 18): 1070,115 1100,115 1125,140 1125,150 1090,185 1080,185 1070,175

## Other copper
Top Layer:
  pour cut-out: 2515.37,-218.85 2515.37,217.15 2372.37,217.15 2372.37,-218.85
  pour cut-out: 2324,-306 2324,308.59 2273,308.59 2273,-306
Bottom Layer:
  pour cut-out: 2515,-219 2515,217 2372,217 2372,-219

## Silkscreen, mask and mechanical layers (free items; w line width, h text height)
Top Overlay:
  lines w5: 2515.5,192.5 2528.5,179.5 2528.5,205.5 2515.5,192.5
  lines w10: 1810,-400 1810,400 ; 1940,-375 1940,375
  text "VCC" at 2096.49,267.05 h50 r90
  text "GND" at 300,265 h32
  text "5V" at 400,265 h32
  text "A1" at 500,265 h32
  text "A0" at 600,265 h32
  text "F2" at 700,265 h32
  text "C15" at 800,265 h32
  text "C14" at 900,265 h32
  text "B8" at 1000,265 h32
  text "B7" at 1100,265 h32
  text "B6" at 1200,265 h32
  text "B5" at 1300,265 h32
  text "B4" at 1400,265 h32
  text "B3" at 1500,265 h32
  text "A15" at 1600,265 h32
  text "GND" at 1700,265 h32
  text "BY:凌" at 2761.7,239 h59.06 r90
  text "1" at 2587,185 h59.06 r90
  text "STM32G031" at 605,175 h45
  text "GND" at 2096.49,162 h50 r90
  text "GND" at 1500,110 h60
  text "CS" at 2096.49,76 h50 r90
  text "RST" at 1320,70 h45
  text "SCK" at 1500,10 h60
  text "RES" at 2096.49,-36 h50 r90
  text "DIO" at 1500,-90 h60
  text "0.66寸OLED" at 2606.7,-122 h59.06 r90
  text "DC" at 2096.49,-123 h50 r90
  text "BOOT" at 1305,-140 h45
  text "3V3" at 1500,-190 h60
  text "16" at 2587,-217 h59.06 r90
  text "SCK" at 2096.49,-233 h50 r90
  text "CH340E" at 788,-247.5 h45
  text "V1.0" at 1680,-255 h32
  text "A4" at 300,-310 h32
  text "A5" at 400,-310 h32
  text "A6" at 500,-310 h32
  text "A7" at 600,-310 h32
  text "B0" at 700,-310 h32
  text "B1" at 800,-310 h32
  text "A8" at 900,-310 h32
  text "A2" at 1000,-310 h32
  text "A3" at 1100,-310 h32
  text "C6" at 1200,-310 h32
  text "A11" at 1300,-310 h32
  text "A12" at 1400,-310 h32
  text "A13" at 1500,-310 h32
  text "A14" at 1600,-310 h32
  text "3V3" at 1700,-310 h32
  text "SDA" at 2096.49,-335 h50 r90
Bottom Overlay:
  text "VCC" at 2088.49,335.95 h50 r90
  text "GND" at 392.65,250 h32
  text "5V" at 476.66,250 h32
  text "A1" at 571.33,250 h32
  text "A0" at 676.66,250 h32
  text "F2" at 776.66,250 h32
  text "C15" at 889.99,250 h32
  text "C14" at 989.99,250 h32
  text "B8" at 1076.66,250 h32
  text "B7" at 1176.66,250 h32
  text "B6" at 1276.66,250 h32
  text "B5" at 1376.66,250 h32
  text "B4" at 1476.66,250 h32
  text "B3" at 1576.66,250 h32
  text "A15" at 1689.99,250 h32
  text "GND" at 1792.65,250 h32
  text "GND" at 2088.49,241 h50 r90
  text "OldGerman" at 599.5,203 h32
  text "CS" at 2088.49,128.67 h50 r90
  text "GND" at 1670,120 h60
  text "0.66寸OLED" at 2315.7,116 h59.06 r90
  text "RES" at 2088.49,35 h50 r90
  text "SCK" at 1670,20 h60
  text "G031 DEV BRD" at 1380,-53 h114.17
  text "DC" at 2088.49,-73.26 h50 r90
  text "DIO" at 1665,-80 h60
  text "JLCJLCJLCJLC" at 1234,-104 h32
  text "SCK" at 2088.49,-165 h50 r90
  text "3V3" at 1670,-180 h60
  text "2022/04" at 599.13,-235 h32
  text "V1.0" at 1790,-235 h32
  text "SDA" at 2088.49,-266 h50 r90
  text "A4" at 376.66,-281.99 h32
  text "A5" at 476.66,-281.99 h32
  text "A6" at 576.66,-281.99 h32
  text "A7" at 676.66,-281.99 h32
  text "B0" at 776.66,-281.99 h32
  text "B1" at 871.33,-281.99 h32
  text "A8" at 976.66,-281.99 h32
  text "A2" at 1076.66,-281.99 h32
  text "A3" at 1176.66,-281.99 h32
  text "C6" at 1276.66,-281.99 h32
  text "A11" at 1384.66,-281.99 h32
  text "A12" at 1489.99,-281.99 h32
  text "A13" at 1589.99,-281.99 h32
  text "A14" at 1689.99,-281.99 h32
  text "3V3" at 1792.65,-281.99 h32
Mechanical 1:
  lines w5: 300,-400 1800,-400 1860,-400 1885,-375 2825,-375 2825,-225 2790,-190 2790,190 2825,225 2825,375 1885,375 1860,400 1800,400 300,400 300,0 300,-400
Mechanical 15:
  lines w5: 310,-260 1790,-260 ; 310,260 1790,260 ; 310,-390 1790,-390 1790,390 310,390 310,-390

## Text inside footprints (layer, text, board x,y; h text height)
OLED1: Bottom Overlay "1" at 2545.73,200.22 h59.06 r90; Bottom Overlay "16" at 2543.4,-162.68 h59.06 r90
U1: Mechanical 13 "*" at 1219.42,82.66 h50 r315